# Altium PCB BLE antenna_2020-10-21_22-06-12.pcbdoc
Units mil, origin at the board's own origin, x right, y up, seen from the top; angles counter-clockwise.
Board outline 4947.01 x 4947.01 mil, 2 copper layers (Top Layer, Bottom Layer); 4 components, 1 nets, 7 pads, 0 vias.
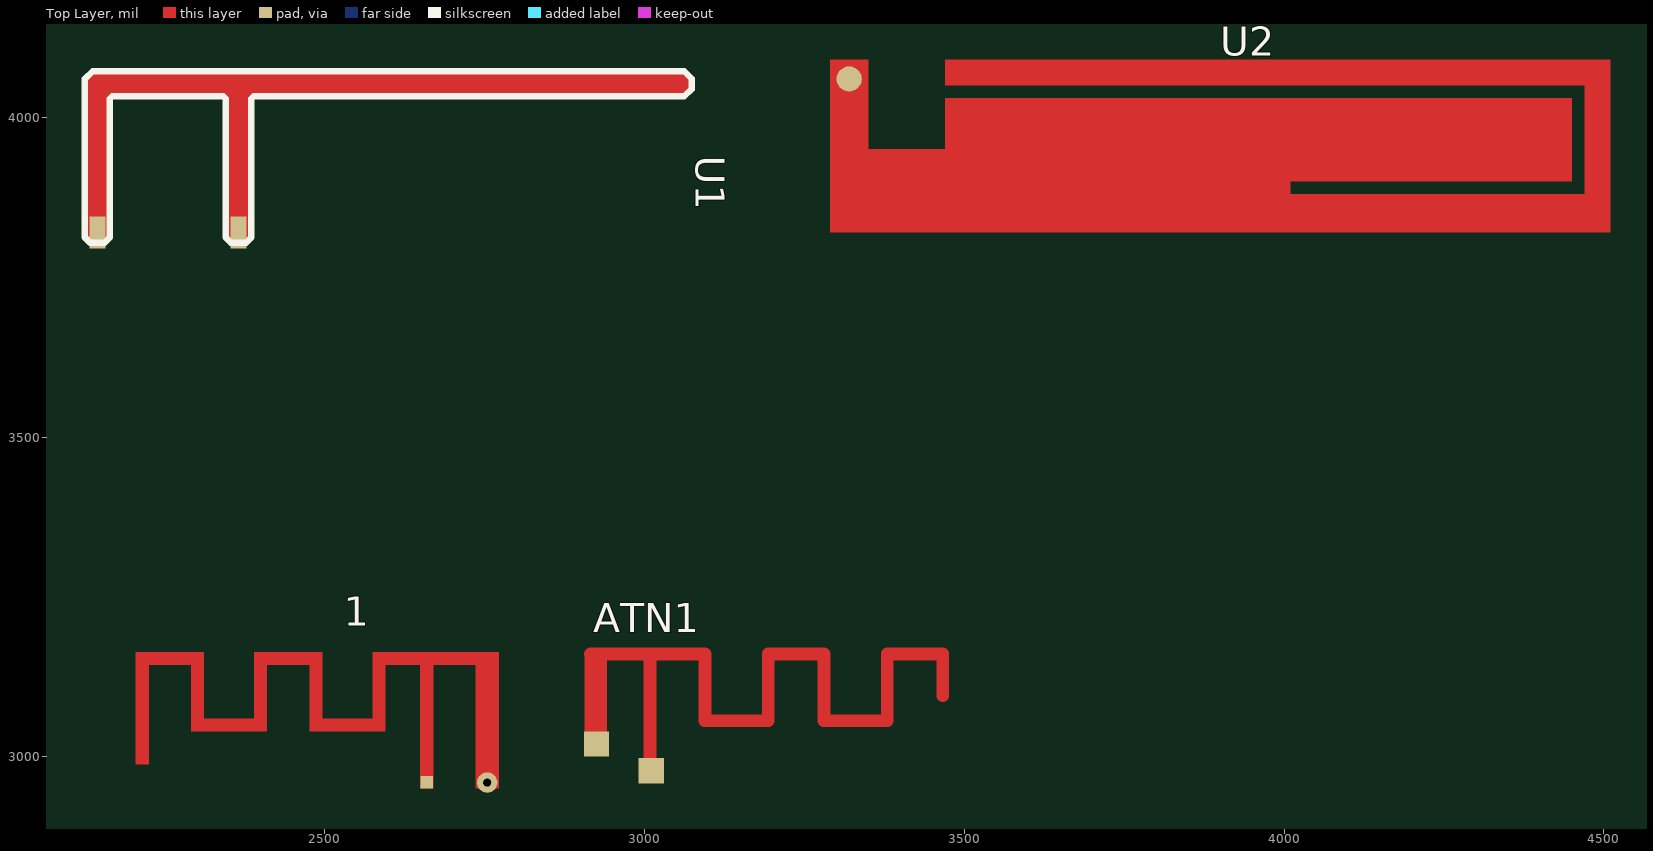
[diagram p0: Top Layer view]
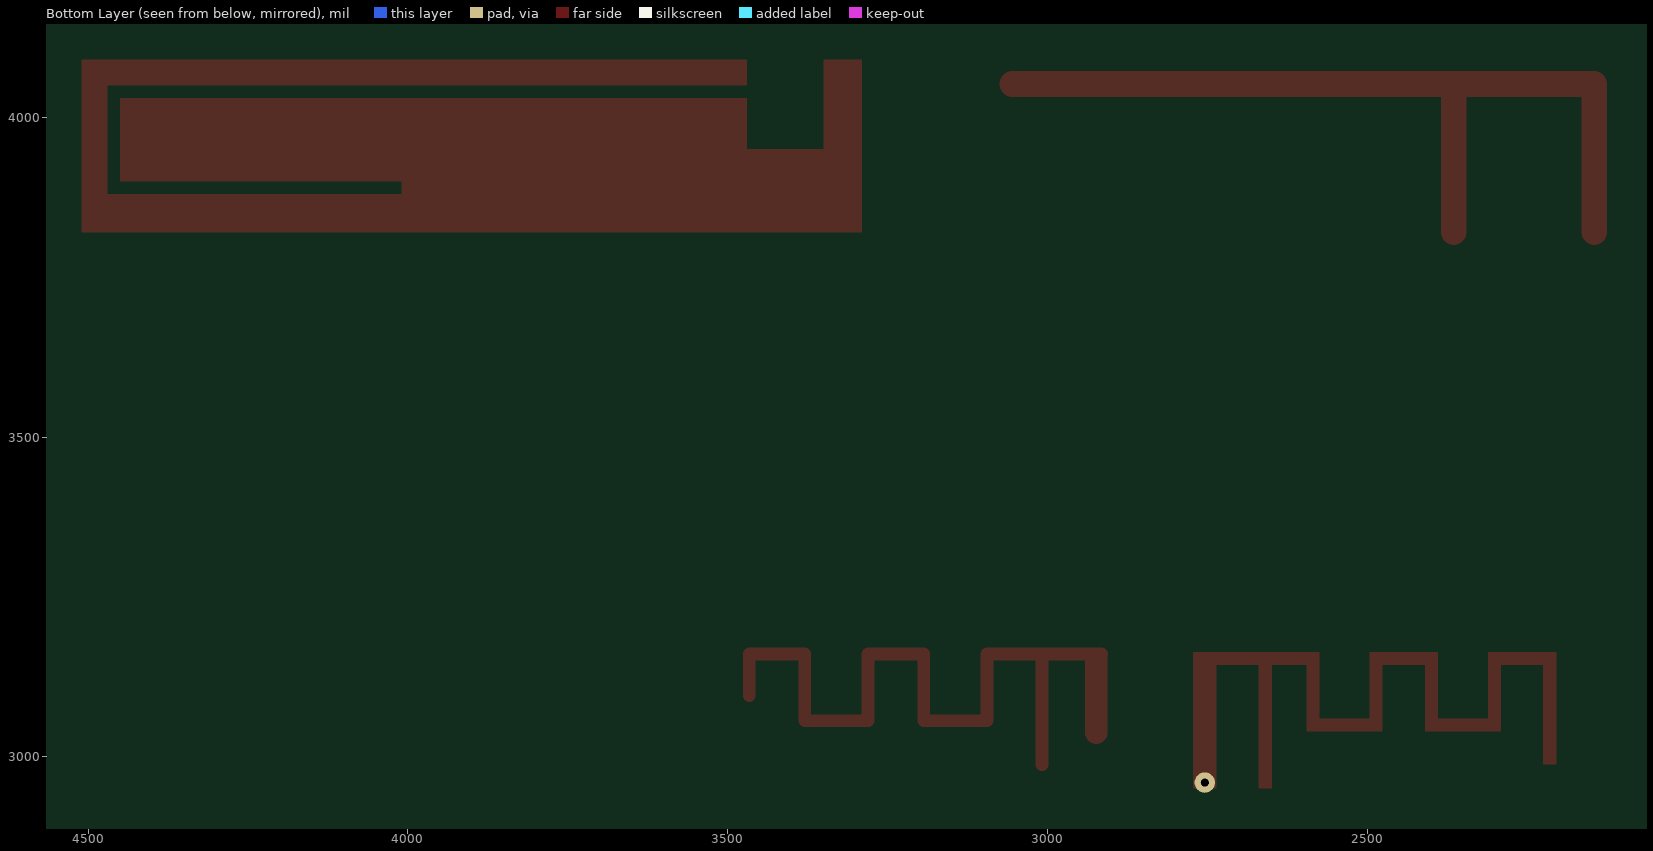
[diagram p1: Bottom Layer view, seen from below]

## Layer stack, top to bottom
Top Solder: solder mask 0.4, Solder Resist, Dk 3.5
Top Layer: signal copper 1.4
Dielectric1: dielectric 12.6, FR-4, Dk 4.8
Bottom Layer: signal copper 1.4
Bottom Solder: solder mask 0.4, Solder Resist, Dk 3.5

## Board outline
5947.01,1000 1000,1000 1000,5947.01 5947.01,5947.01

## Design rules (kind name [scope] priority, off if disabled: settings)
Clearance [All] p1: gap=10 ignorepadtopadclearanceinfootprint=FALSE except(0: Arc-Hole Track-Hole SMDPad-Hole THPad-Hole Via-Hole Fill-Hole Poly-Hole Region-Hole Text-Hole)
PolygonConnect [All] p1: connectstyle=Relief reliefconductorwidth=10 reliefentries=4 polygonreliefangle="90 Angle" airgapwidth=10
RoutingVias [All] p1: holewidth=28 width=50 viastyle="Through Hole" minholewidth=28 minwidth=50 maxholewidth=28 maxwidth=50
SolderMaskExpansion [All] p1: expansion=4
Width [All] p1: maxlimit=10 minlimit=10 preferedwidth=10
30 further rules are at their usual default settings.

## Components (designator, comment, footprint, x,y, rotation, side; value= is the part's Value field where it differs from the comment)
1 "ANTENNA_F_PCB" ANTENNA_F_PCB 2815,3057.01 r0 top
ATN1 "ANTENNA_PCB" ANTENNA_PCB 3123.43,3032.6 r270 top
U1 "PCB_F_ANTENNA_MIROR" PCB_F_ANTENNA_MIROR 2255,3820 r270 top
U2 "ANTENA-GSM" ANTENA-GSM 3840,3950 r0 top

## Footprints (in the part's own frame and the unit in brackets; to place one, negate y for a bottom-side part, rotate by r counter-clockwise, add the part's x,y. Pads: shape width x height; smd on the part's side, far side on the other; paste and mask are expansions set on the pad)
ANTENA-GSM [mil]
  round 39.37 smd: 1(-520,110)
  Top Layer region: -550,140 -490,140 -490,-130 -550,-130 -550,-110
  Top Layer region: -490,0 -370,0 -370,-130 -490,-130
  Top Layer region: -370,80 610,80 610,-50 -370,-50
  Top Layer region: -370,-50 170,-50 170,-130 -370,-130
  Top Layer region: 170,-70 670,-70 670,-130 170,-130
  Top Layer region: 670,-70 670,140 630,140 630,30 630,-70 640,-70
  Top Layer region: -370,140 630,140 630,100 -370,100
ANTENNA_F_PCB [mil]
  round 32.01 hole 12 unplated: GND(-61.02,-97.24)
  rect 19.68x19.68 smd: RF(-155.51,-96.46)
  Top Layer region: -240.16,86.61 -43.31,86.61 -43.31,106.3 -240.16,106.3
  Top Layer region: -240.16,-17.32 -220.47,-17.32 -220.47,86.61 -240.16,86.61
  Top Layer region: -318.9,-17.32 -240.16,-17.32 -240.16,2.36 -318.9,2.36
  Top Layer region: -338.58,-17.32 -318.9,-17.32 -318.9,86.61 -338.58,86.61
  Top Layer region: -425.2,-17.32 -405.51,-17.32 -405.51,86.61 -425.2,86.61
  Top Layer region: -523.62,-17.32 -503.94,-17.32 -503.94,86.61 -523.62,86.61
  Top Layer region: -425.2,86.61 -318.9,86.61 -318.9,106.3 -425.2,106.3
  Top Layer region: -610.24,86.61 -503.94,86.61 -503.94,106.3 -610.24,106.3
  Top Layer region: -503.94,-17.32 -425.2,-17.32 -425.2,2.36 -503.94,2.36
  Top Layer region: -165.35,-106.3 -145.67,-106.3 -145.67,86.61 -165.35,86.61
  Top Layer region: -78.74,-106.3 -43.31,-106.3 -43.31,86.61 -78.74,86.61
  Top Layer region: -610.23,-68.5 -590.55,-68.5 -590.55,86.61 -610.23,86.61
ANTENNA_PCB [mm]
  rect 1x1 smd: 1(0.32,-5.04) 2(1.38,-2.87)
  Top Layer lines w0.508: -3.251,-5.283 -3.251,-2.921 ; 1.143,-2.921 -3.251,-2.921 ; -1.6,8.712 -3.251,8.712 -3.251,6.502 -0.61,6.502 -0.61,3.988 -3.251,3.988 -3.251,1.778 -0.61,1.778 -0.61,-0.737 -3.251,-0.737 -3.251,-2.921
  Top Layer lines w0.889: -0.127,-5.08 -3.048,-5.08
PCB_F_ANTENNA_MIROR [mil]
  rect 50x25 smd: P$1(0,110) P$2(0,-110)
  Top Layer lines w40: 0,-110 -232,-110 -232,110 ; 0,110 -232,110 ; -232,800 -232,110
  silkscreen extent -252,-130 16,819

## Nets (pads, with @x,y where several pads share a name; then routed paths per layer and width w, separated by ;. In a path a pad name is that pad's centre, name@x,y a point inside that pad or via, vN(x,y) a via of type N, cw(c..) or ccw(c..) an arc to the next point about the centre after c; other vN are vias at no path point)
1: 
pads on no net: 1.GND 1.RF ATN1.1 ATN1.2 U1.P$1 U1.P$2 U2.1